# Altium PCB Final_PCB.PcbDoc (part 2 of 2)
Units mm, origin at the board's own origin, x right, y up, seen from the top; angles counter-clockwise.
Board outline 88.27 x 49.85 mm, 2 copper layers (Top Layer, Bottom Layer); 47 components, 63 nets, 231 pads, 57 vias.
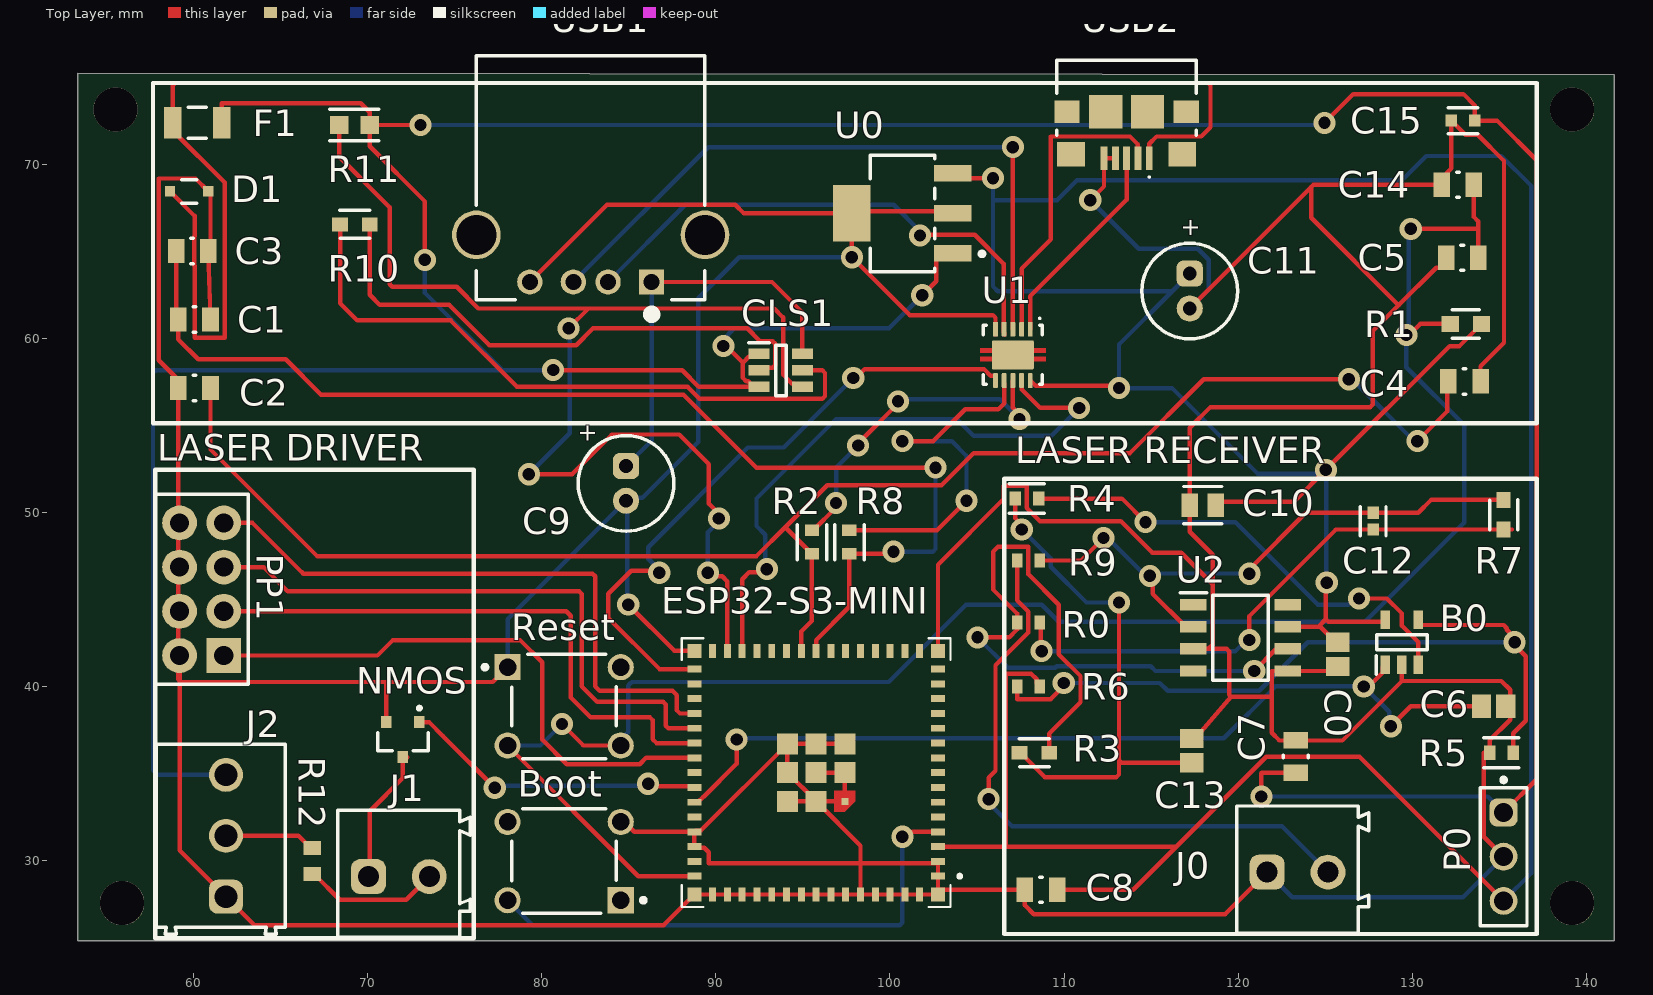
[diagram p0: Top Layer view]

## Via types
v1: diameter 1.27, hole 0.711, Top Layer to Bottom Layer, 57 vias

## Nets (pads, with @x,y where several pads share a name; then routed paths per layer and width w, separated by ;. In a path a pad name is that pad's centre, name@x,y a point inside that pad or via, vN(x,y) a via of type N, cw(c..) or ccw(c..) an arc to the next point about the centre after c; other vN are vias at no path point) (continued)
RXD0: (continued)
  Bottom Layer w0.254: v1(91.186,36.957) 91.259,37.03 119.173,37.03 122.148,40.005 v1(127.223,40.005) 128.679,38.549 128.679,37.818 v1(128.778,37.719)
TXD0: ESP32-S3-MINI.39 NMOS.1 | length 17.5
  Top Layer w0.254: NMOS.1 73.519,37.957 74.295,37.181 v1(77.293,34.183) ; v1(86.106,34.417) 86.247,34.276 88.684,34.276 ESP32-S3-MINI.39
  Bottom Layer w0.254: v1(77.293,34.183) 77.41,34.3 85.989,34.3 v1(86.106,34.417)
USB0_D_N: U1.2 USB2.2 | length 18
  Top Layer w0.254: U1.2@107.561,60.325 U1.2 107.561,64.008 109.245,65.692 109.245,71.603 113.792,71.603 114.245,71.15 USB2.2
USB0_D_P: U1.1 USB2.3 | length 12.1
  Top Layer w0.254: U1.1 108.061,62.436 113.595,67.97 USB2.3
USB1_D_N: U1.4 USB1.2 | length 30.2
  Top Layer w0.254: v1(101.727,65.913) 101.769,65.955 104.864,65.955 106.528,64.291 106.528,60.345 106.561,60.312 U1.4@106.561,60.207
  Bottom Layer w0.254: USB1.2 88.241,67.682 100.212,67.682 101.727,66.167 v1(101.727,65.913)
USB1_D_P: U1.3 USB1.3 | length 38.9
  Top Layer w0.254: U1.3 v1(107.061,70.993)
  Bottom Layer w0.254: USB1.3 89.552,70.993 v1(107.061,70.993)
USB_D_N: C1.1 C3.1 ESP32-S3-MINI.23 R8.2 | length 67.8
  Top Layer w0.254: C3.1 58.983,61.214 C1.1 59.11,59.944 60.253,58.801 65.278,58.801 67.31,56.769 88.138,56.769 92.329,52.578 v1(102.616,52.578) ; ESP32-S3-MINI.23 95.757,42.672 97.663,44.578 97.663,47.502 R8.2 100.076,47.625 v1(100.203,47.752)
  Bottom Layer w0.254: v1(100.203,47.752) 102.467,47.752 102.616,47.901 v1(102.616,52.578)
USB_D_P: C2.1 C4.1 ESP32-S3-MINI.24 R2.2 | length 93.2
  Top Layer w0.254: C2.1 60.96,53.619 67.081,47.498 92.329,47.498 93.983,49.152 ; ESP32-S3-MINI.24 94.907,43.162 95.509,43.764 R2.2 93.983,49.152 ; v1(126.365,57.658) 118.034,57.658 113.792,53.416 104.815,53.416 102.96,51.562 96.393,51.562 93.983,49.152 ; v1(130.302,54.102) 132.026,55.826 132.026,57.477 C4.1
  Bottom Layer w0.254: v1(126.365,57.658) 126.556,57.658 130.112,54.102 v1(130.302,54.102)
pads on no net: Boot.1 Boot.4 ESP32-S3-MINI.66_1 ESP32-S3-MINI.66_2 ESP32-S3-MINI.66_3 ESP32-S3-MINI.66_4 ESP32-S3-MINI.66_5 ESP32-S3-MINI.66_6 ESP32-S3-MINI.66_7 ESP32-S3-MINI.66_8 ESP32-S3-MINI.66_9 ESP32-S3-MINI.66_10 ESP32-S3-MINI.66_11 ESP32-S3-MINI.66_12 Reset.2 U1.11 U2.1 U2.4 U2.8 USB1.5 USB1.6 USB2.6 USB2.7 USB2.8 USB2.9 USB2.10 USB2.11

## Silkscreen, mask and mechanical layers (free items; w line width, h text height)
Top Overlay:
  lines w0.254: 57.658,55.118 137.16,55.118 137.16,74.676 57.658,74.676 57.658,55.118 ; 57.785,25.527 76.073,25.527 76.073,52.451 57.785,52.451 57.785,25.527 ; 106.553,25.781 137.16,25.781 137.16,51.943 106.553,51.943 106.553,25.781
  text "LASER DRIVER" at 57.912,52.959 h1.52
  text "LASER RECEIVER" at 107.188,52.832 h1.52

## Text inside footprints (layer, text, board x,y; h text height)
C9: Top Overlay "+" at 83.058,53.975 h1 r90
C11: Top Overlay "+" at 117.721,65.772 h1 r90